# EAGLE board NoAgricultura (EAGLE 8.7.1)

Size 160 x 100 mm. Coordinates in mm from the lower left corner, seen from the top.
Outline: 0,0 160,0 160,100 0,100 0,0
Copper layers (1*16): Top 0.035mm / dielectric 1.5mm / Bottom 0.035mm
Design rules "default": minimum track width 6mil, minimum drill 0.35mm, track to track 6mil, track to pad 6mil, pad to pad 6mil, via to via 6mil, smd to smd 6mil, copper to edge 40mil, drill to drill 6mil, minimum pad ring 10mil, minimum via ring 8mil, stop-mask expansion 4mil, vias tented up to drill 0mil, thermal gap 10mil

## Footprints (pad centres in the part's own frame; a part is rotated, then mirrored left to right if it is on the bottom)
CAPC2012X140N = smd 1.16 x 1.47: 1 -0.875,0; 2 0.875,0
QFP80P1200X1200X120-44N = smd 1.475 x 0.6: 1 -5.738,4; 2 -5.738,3.2; 3 -5.738,2.4; 4 -5.738,1.6; 5 -5.738,0.8; 6 -5.738,0; 7 -5.738,-0.8; 8 -5.738,-1.6; 9 -5.738,-2.4; 10 -5.738,-3.2; 11 -5.738,-4; 23 5.738,-4; 24 5.738,-3.2; 25 5.738,-2.4; 26 5.738,-1.6; 27 5.738,-0.8; 28 5.738,0; 29 5.738,0.8; 30 5.738,1.6; 31 5.738,2.4; 32 5.738,3.2; 33 5.738,4 | smd 0.6 x 1.475: 12 -4,-5.738; 13 -3.2,-5.738; 14 -2.4,-5.738; 15 -1.6,-5.738; 16 -0.8,-5.738; 17 0,-5.738; 18 0.8,-5.738; 19 1.6,-5.738; 20 2.4,-5.738; 21 3.2,-5.738; 22 4,-5.738; 34 4,5.738; 35 3.2,5.738; 36 2.4,5.738; 37 1.6,5.738; 38 0.8,5.738; 39 0,5.738; 40 -0.8,5.738; 41 -1.6,5.738; 42 -2.4,5.738; 43 -3.2,5.738; 44 -4,5.738
INDC4532X340N = smd 1.295 x 3.607: 1 -2.261,0; 2 2.261,0
RESC2012X65N = smd 1 x 1.42: 1 -0.935,0; 2 0.935,0
SOT95P300X145-5N = smd 1.321 x 0.559: 1 -1.372,0.94; 2 -1.372,0; 3 -1.372,-0.94; 4 1.372,-0.94; 5 1.372,0.94
SON50P250X250X100-9N = smd 0.8 x 0.3: 1 -1.2,0.75; 2 -1.2,0.25; 3 -1.2,-0.25; 4 -1.2,-0.75; 5 1.2,-0.75; 6 1.2,-0.25; 7 1.2,0.25; 8 1.2,0.75 | smd 0.2 x 1: 9 0,0
SOT50P160X90-3N = smd 1.016 x 0.356: 1 -0.813,0.508; 2 -0.813,-0.508 | smd 1.016 x 0.305: 3 0.813,0
PANASONIC-SCAP-5.5V-0.1F = drill 1.2 square: P$1 -5,0; P$2 0,0
CAPMTANT-TYPEA = smd 1.606 x 1.25: 1 -1.411,0; 2 1.411,0
TEMP-HUM-SENSOR-DHT22 = drill 0.8 square: 1 -3.81,0 | drill 0.8: 2 -1.27,0; 3 1.27,0; 4 3.81,0
22-23-2051 = drill 1 long: 1 -5.08,0; 2 -2.54,0; 3 0,0; 4 2.54,0; 5 5.08,0

## Placement (x,y rotation side)
C1  1uF  [CAPC2012X140N]  -69.85,74.93 0 top  (outside the outline)
C2  1uF  [CAPC2012X140N]  -15.24,81.28 0 top  (outside the outline)
C3  1uF  [CAPC2012X140N]  -20.32,81.28 0 top  (outside the outline)
C5  1uF  [CAPC2012X140N]  -25.4,81.28 0 top  (outside the outline)
C6  1uF  [CAPC2012X140N]  -30.48,81.28 0 top  (outside the outline)
IC1  PIC18F45K80-I_PT  [QFP80P1200X1200X120-44N]  -21.59,31.75 0 top  (outside the outline)
L1  B82432T1222K  [INDC4532X340N]  -57.15,55.88 0 top  (outside the outline)
R1  1M  [RESC2012X65N]  -24.13,76.2 0 top  (outside the outline)
R2  1M  [RESC2012X65N]  -29.21,76.2 0 top  (outside the outline)
R3  1M  [RESC2012X65N]  -34.29,76.2 0 top  (outside the outline)
R4  1M  [RESC2012X65N]  -39.37,76.2 0 top  (outside the outline)
R5  CRGH0805F392R  [RESC2012X65N]  -19.05,76.2 0 top  (outside the outline)
R6  10k  [RESC2012X65N]  -44.45,76.2 0 top  (outside the outline)
R7  2K  [RESC2012X65N]  -49.53,76.2 0 top  (outside the outline)
R8  100R  [RESC2012X65N]  -54.61,76.2 0 top  (outside the outline)
R9  10k  [RESC2012X65N]  -59.69,76.2 0 top  (outside the outline)
R10  10k  [RESC2012X65N]  -64.77,76.2 0 top  (outside the outline)
U1  MCP73832T-5ACI/OT  [SOT95P300X145-5N]  -38.1,67.31 0 top  (outside the outline)
U2  SHT31-DIS-B  [SON50P250X250X100-9N]  -69.85,66.04 0 top  (outside the outline)
U$1  NTA4151P  [SOT50P160X90-3N]  -43.18,30.48 0 top  (outside the outline)
U$2  NTA4151P  [SOT50P160X90-3N]  -60.96,30.48 0 top  (outside the outline)
U$3  NTA4151P  [SOT50P160X90-3N]  -26.67,44.45 0 top  (outside the outline)
U$4  NTA4151P  [SOT50P160X90-3N]  -44.45,44.45 0 top  (outside the outline)
U$5  NTA4151P  [SOT50P160X90-3N]  -62.23,44.45 0 top  (outside the outline)
U$6  PANASONIC-SCAP-5.5V-0.1F  [PANASONIC-SCAP-5.5V-0.1F]  -22.86,12.7 0 top  (outside the outline)
U$7  CAPTANT-TYPEA  [CAPMTANT-TYPEA]  -53.34,66.04 0 top  (outside the outline)
U$8  TEMP-HUM-SENSOR-DHT22  [TEMP-HUM-SENSOR-DHT22]  -50.8,8.89 0 top  (outside the outline)
X1  22-23-2051  [22-23-2051]  -20.32,57.15 0 top  (outside the outline)
X2  22-23-2051  [22-23-2051]  -34.29,57.15 0 top  (outside the outline)

## Library data of the parts
C1-C3 C5 C6 = 0805YC104KA76A; AVAILABILITY: Unavailable; DESCRIPTION: Cap Ceramic 0.1uF 16V X7R 10% SMD 0805 125°C Waffle; MF: AVX; MP: 0805YC104KA76A; PACKAGE: 0805 AVX; PRICE: None
IC1 = PIC18F45K80-I_PT; ALLIED_NUMBER: 70047564; ALLIED_PRICE-STOCK: http://www.alliedelec.com/microchip-technology-inc-pic18f45k80-i-pt/70047564/; DESCRIPTION: MCU, 32kB Flash, ECAN, 12-bit ADC, CTMU; HEIGHT: 1.2mm; MANUFACTURER_NAME: Microchip; MANUFACTURER_PART_NUMBER: PIC18F45K80-I/PT; MOUSER_PART_NUMBER: 579-PIC18F45K80-I/PT; MOUSER_PRICE-STOCK: https://www.mouser.com/Search/Refine.aspx?Keyword=579-PIC18F45K80-I%2FPT; RS_PART_NUMBER: 8895477; RS_PRICE-STOCK: http://uk.rs-online.com/web/p/products/8895477
L1 = B82432T1222K; AVAILABILITY: Unavailable; DESCRIPTION: Ind Chip Molded Wirewound 2.2uH 10% 7.96MHz 10Q-Factor Ferrite 1A 1812 Blister T/R; MF: EPCOS; MP: B82432T1222K; PACKAGE: 1812 EPCOS; PRICE: None
R1-R10 = 0805 Resistor; AVAILABILITY: Unavailable; COMMENT: 5-1879509-5; DESCRIPTION: Res Thick Film 0805 392 Ohm 1% 1/3W ±100ppm/°C Molded SMD SMD T/R; MF: TE Connectivity; MP: CRGH0805F392R; PACKAGE: 0805 TE Connectivity; PRICE: None; TE_PURCHASE_URL: https://www.te.com/usa-en/product-5-1879509-5.html?te_bu=Cor&te_type=disp&te_campaign=seda_glo_cor-seda-global-disp-prtnr-fy19-seda-model-bom-cta_sma-317_1&elqCampaignId=32493
U1 = MCP73832T-5ACI_OT; AVAILABILITY: Unavailable; DESCRIPTION: Tiny Integrated Li-Ion/Li-Poly Charge mgnt controller, 4.5V Vreg out; MF: Microchip; MP: MCP73832T-5ACI/OT; PACKAGE: SOT-23 Microchip; PRICE: None
U2 = SHT31-DIS-B; AVAILABILITY: Unavailable; DESCRIPTION: SHT31 Series 5.5 V 800 µA Surface Mount Humidity and Temperature Sensor; MF: Sensirion AG; MP: SHT31-DIS-B; PACKAGE: TDFN-8 Sensirion; PRICE: None
U$1-U$5 = nta4151p
U$6 = SCAP-PANASONIC5.5V1F5MM20MM
U$7 = CAPTANT-TYPEA
U$8 = diy-modules
X1 X2 = con-molex; MF: MOLEX; MPN: 22-23-2051; OC_FARNELL: 1462952; OC_NEWARK: 38C9178

## Nets
AN0: IC1.19 X2.2
BATSTART: U1.1
EXP: U2.9
ICSPCLK: IC1.16 X1.5
ICSPDAT: IC1.17 X1.4
IN+: R1.2 U$1.2
MCLR: R8.2 X1.1
N$1: L1.1 R2.2 U$1.3 U$2.2
N$2: L1.2 R3.2 R4.2 U$3.2 U$4.2
N$4: R7.1 U1.5
N$5: U$5.3
N$7: C1.2 R6.1 R8.1
N$8: U$8.3
OUT+: R5.2 U$5.2
SCL: IC1.37 R10.2 U2.4 X2.4
SDA: IC1.42 R9.2 U2.1 U$8.2 X2.3
SW1: R1.1 U$1.1
SW2: R2.1 U$2.1
SW3: R3.1 U$4.1
SW4: R4.1 U$3.1
SWCAP: R5.1 U$5.1
VBAT: U1.3
VDD: C5.2 C6.2 R9.1 R10.1 U1.4 U2.2 U2.5 U$3.3 U$7.1 U$8.1 X1.2 X2.1
VDD_1: C3.1 IC1.28
VDDCORE/VCAP: IC1.23
VMICRO: R6.2
VSS: C1.1 C2.1 C2.2 C5.1 C6.1 IC1.6 IC1.7 R7.2 U1.2 U2.7 U2.8 U$2.3 U$4.3 U$7.2 U$8.4 X1.3 X2.5
VSS_1: C3.2 IC1.29

## Tracks (layer width: path | path; a pad name or v marks a point on that pad's centre or on a via)
AN0  (1 unrouted)
ICSPCLK  (1 unrouted)
ICSPDAT  (1 unrouted)
IN+  (1 unrouted)
MCLR  (1 unrouted)
N$1  (3 unrouted)
N$2  (4 unrouted)
N$4  (1 unrouted)
N$7  (2 unrouted)
OUT+  (1 unrouted)
SCL  (3 unrouted)
SDA  (4 unrouted)
SW1  (1 unrouted)
SW2  (1 unrouted)
SW3  (1 unrouted)
SW4  (1 unrouted)
SWCAP  (1 unrouted)
VDD  (11 unrouted)
VDD_1  (1 unrouted)
VSS  (16 unrouted)
VSS_1  (1 unrouted)